# Altium PCB main.PcbDoc
Units mm, origin at the board's own origin, x right, y up, seen from the top; angles counter-clockwise.
Board outline 99 x 99 mm, 4 copper layers (Top Layer, Layer 1, Layer 2, Bottom Layer), stack 1.591 mm thick; 63 components, 42 nets, 302 pads, 0 vias.
Unrouted connection lines stored in the file: 169.
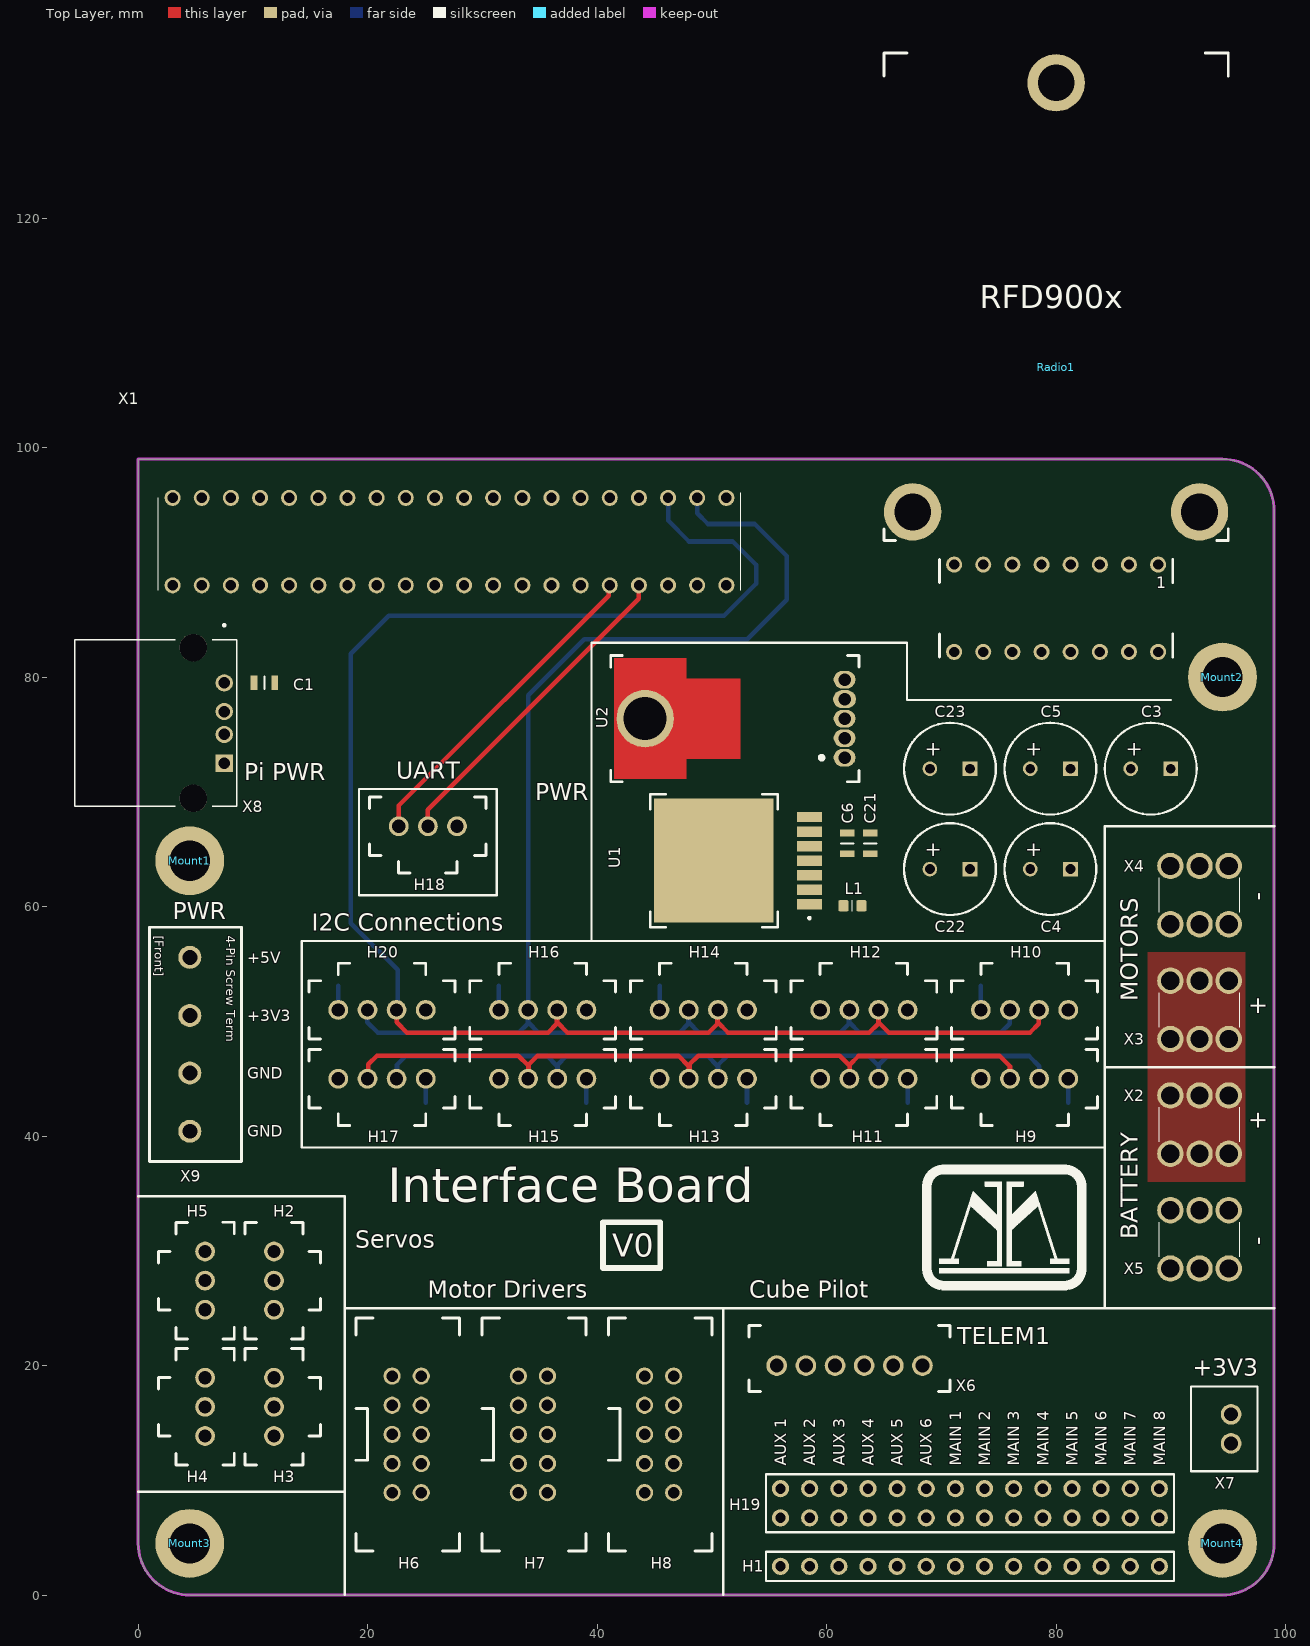
[diagram p0: Top Layer view]
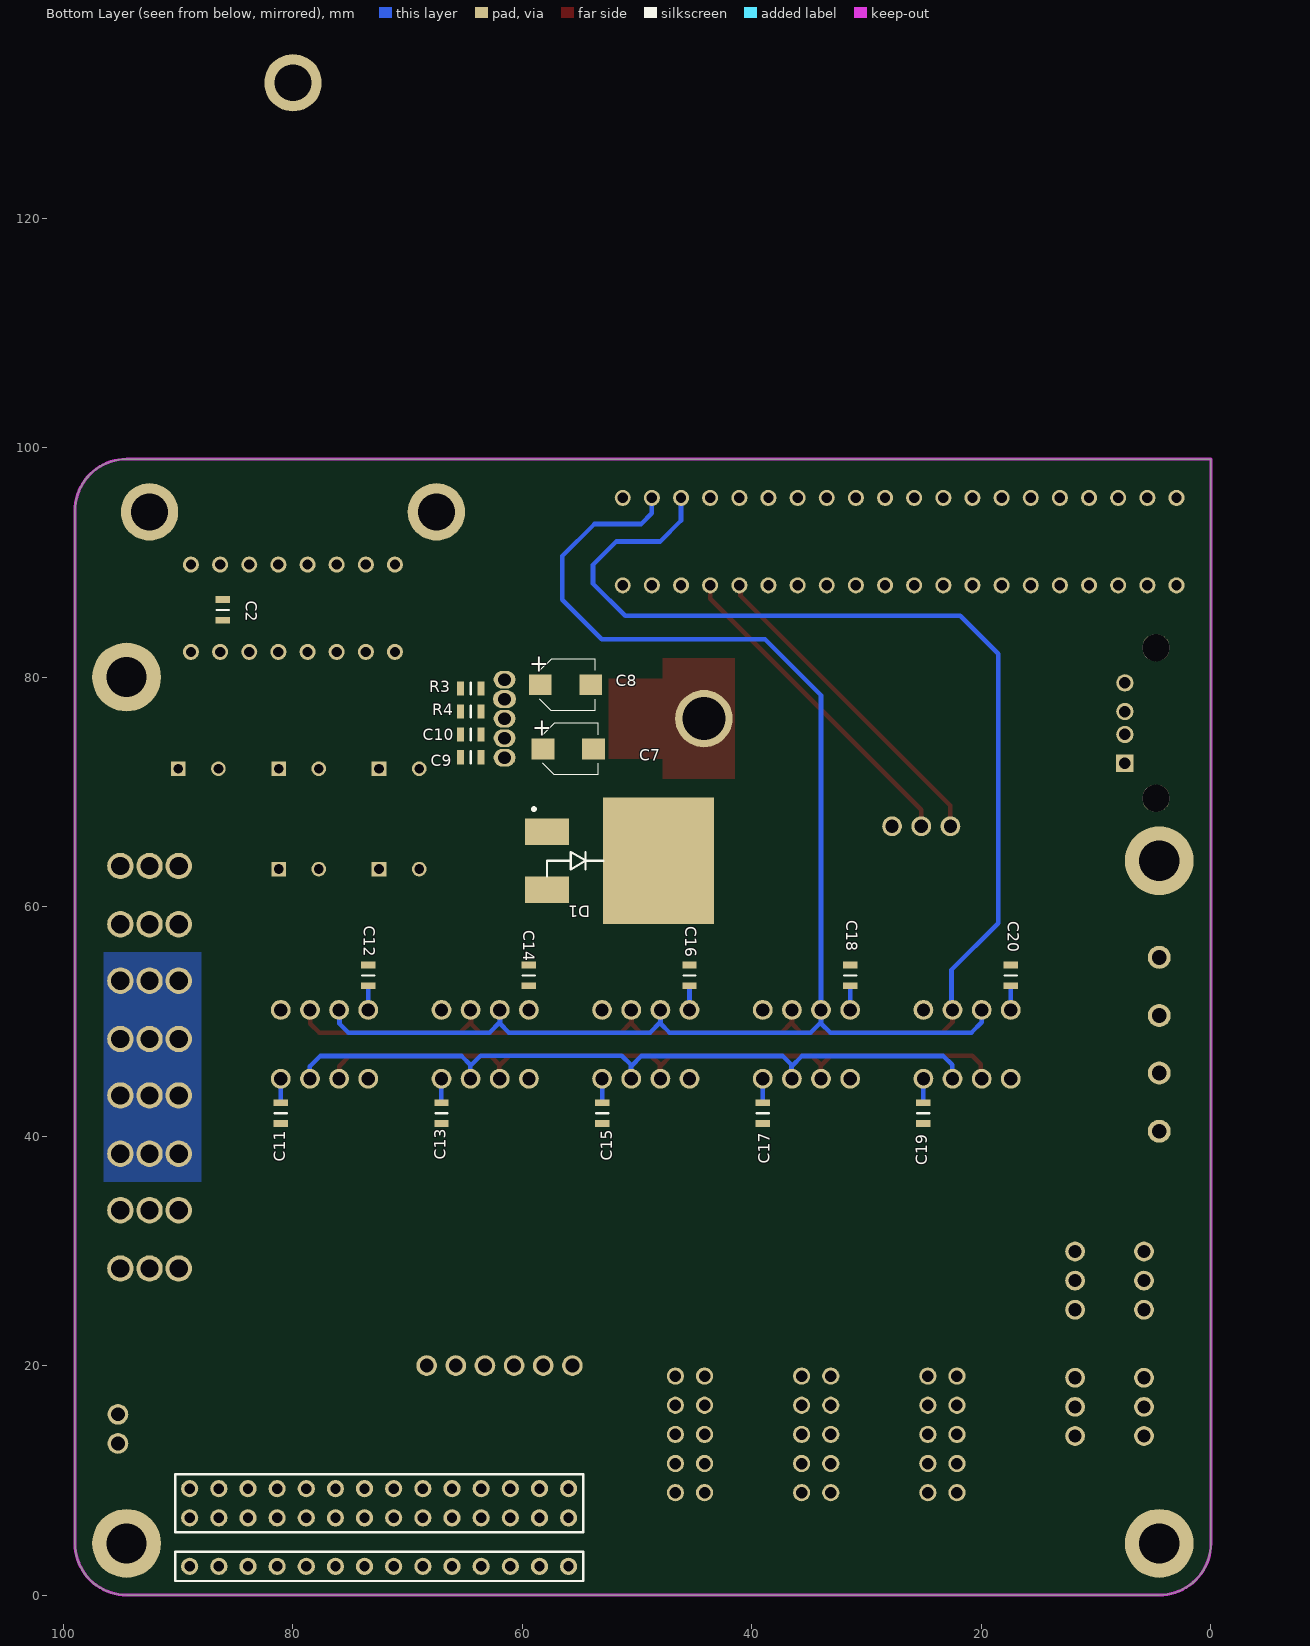
[diagram p1: Bottom Layer view, seen from below]
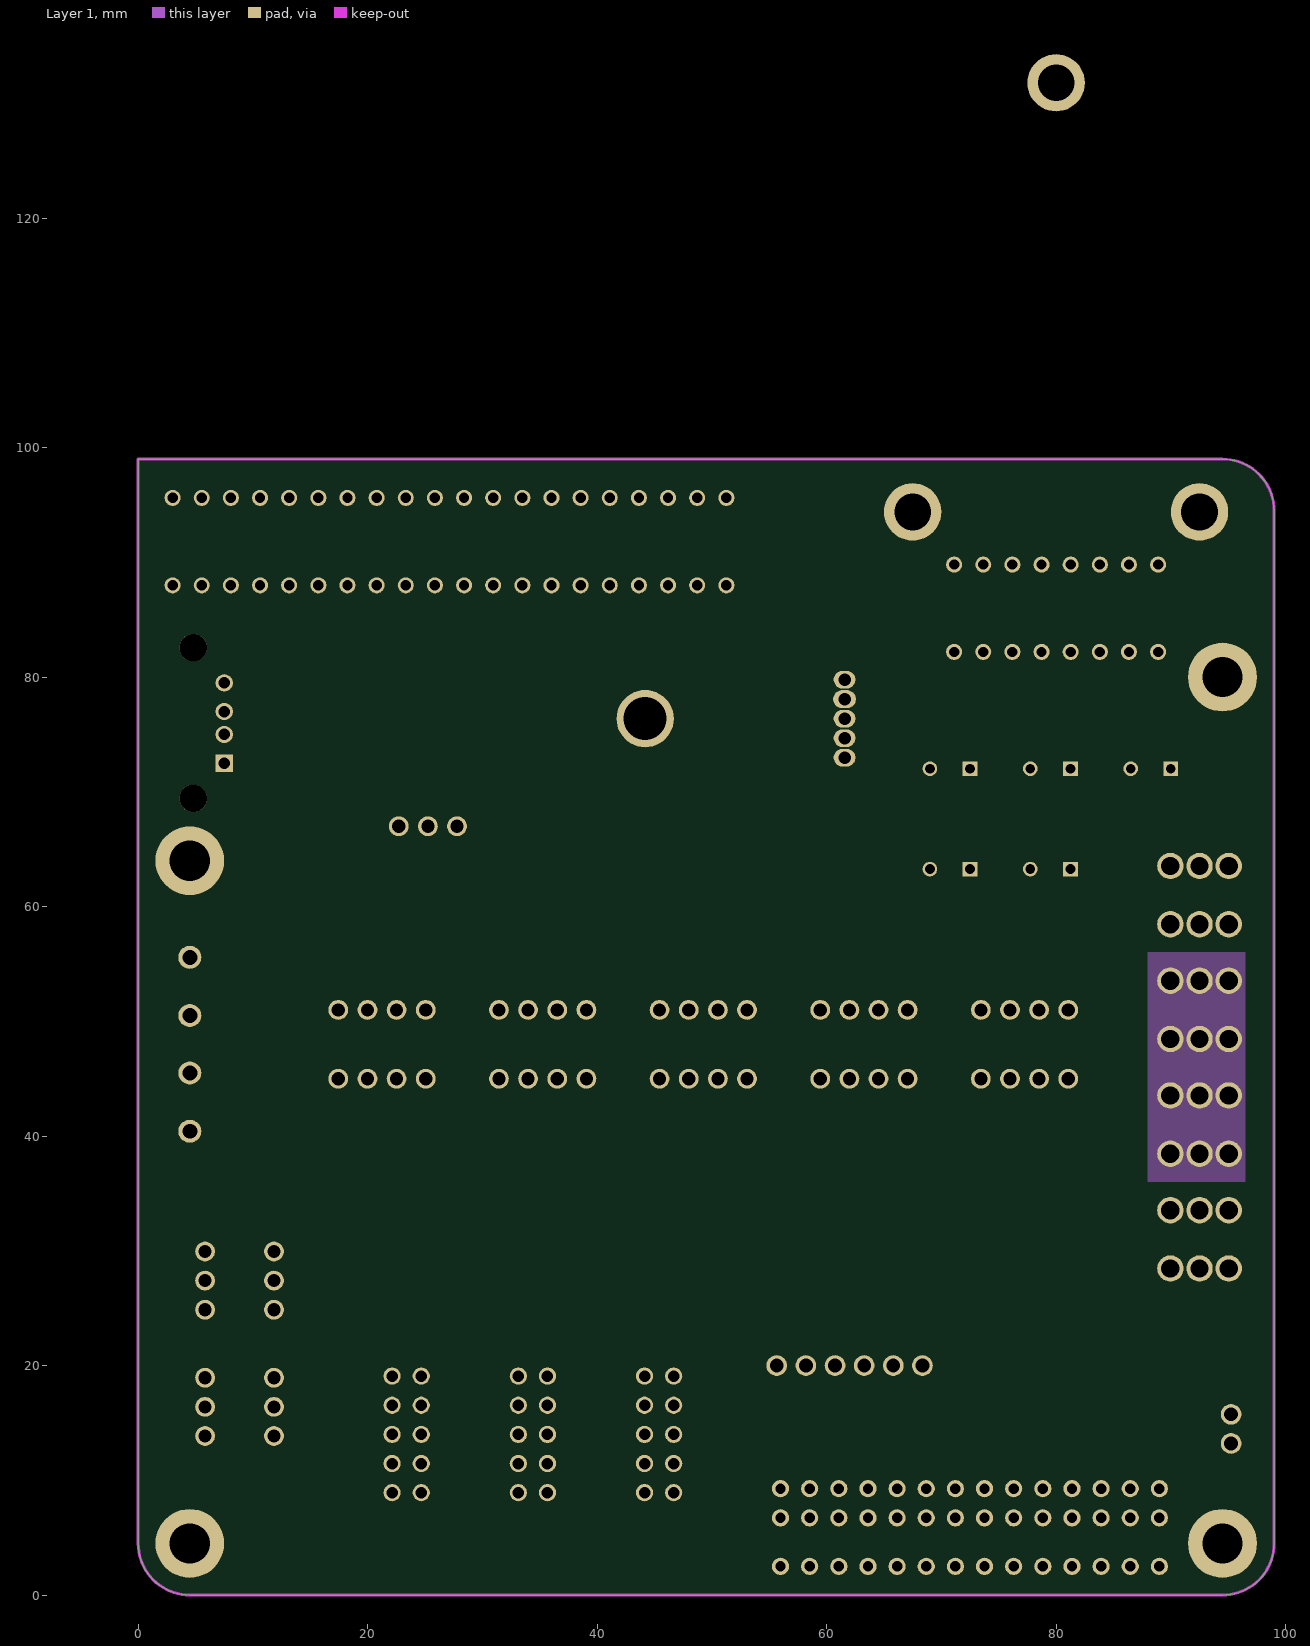
[diagram p2: Layer 1]
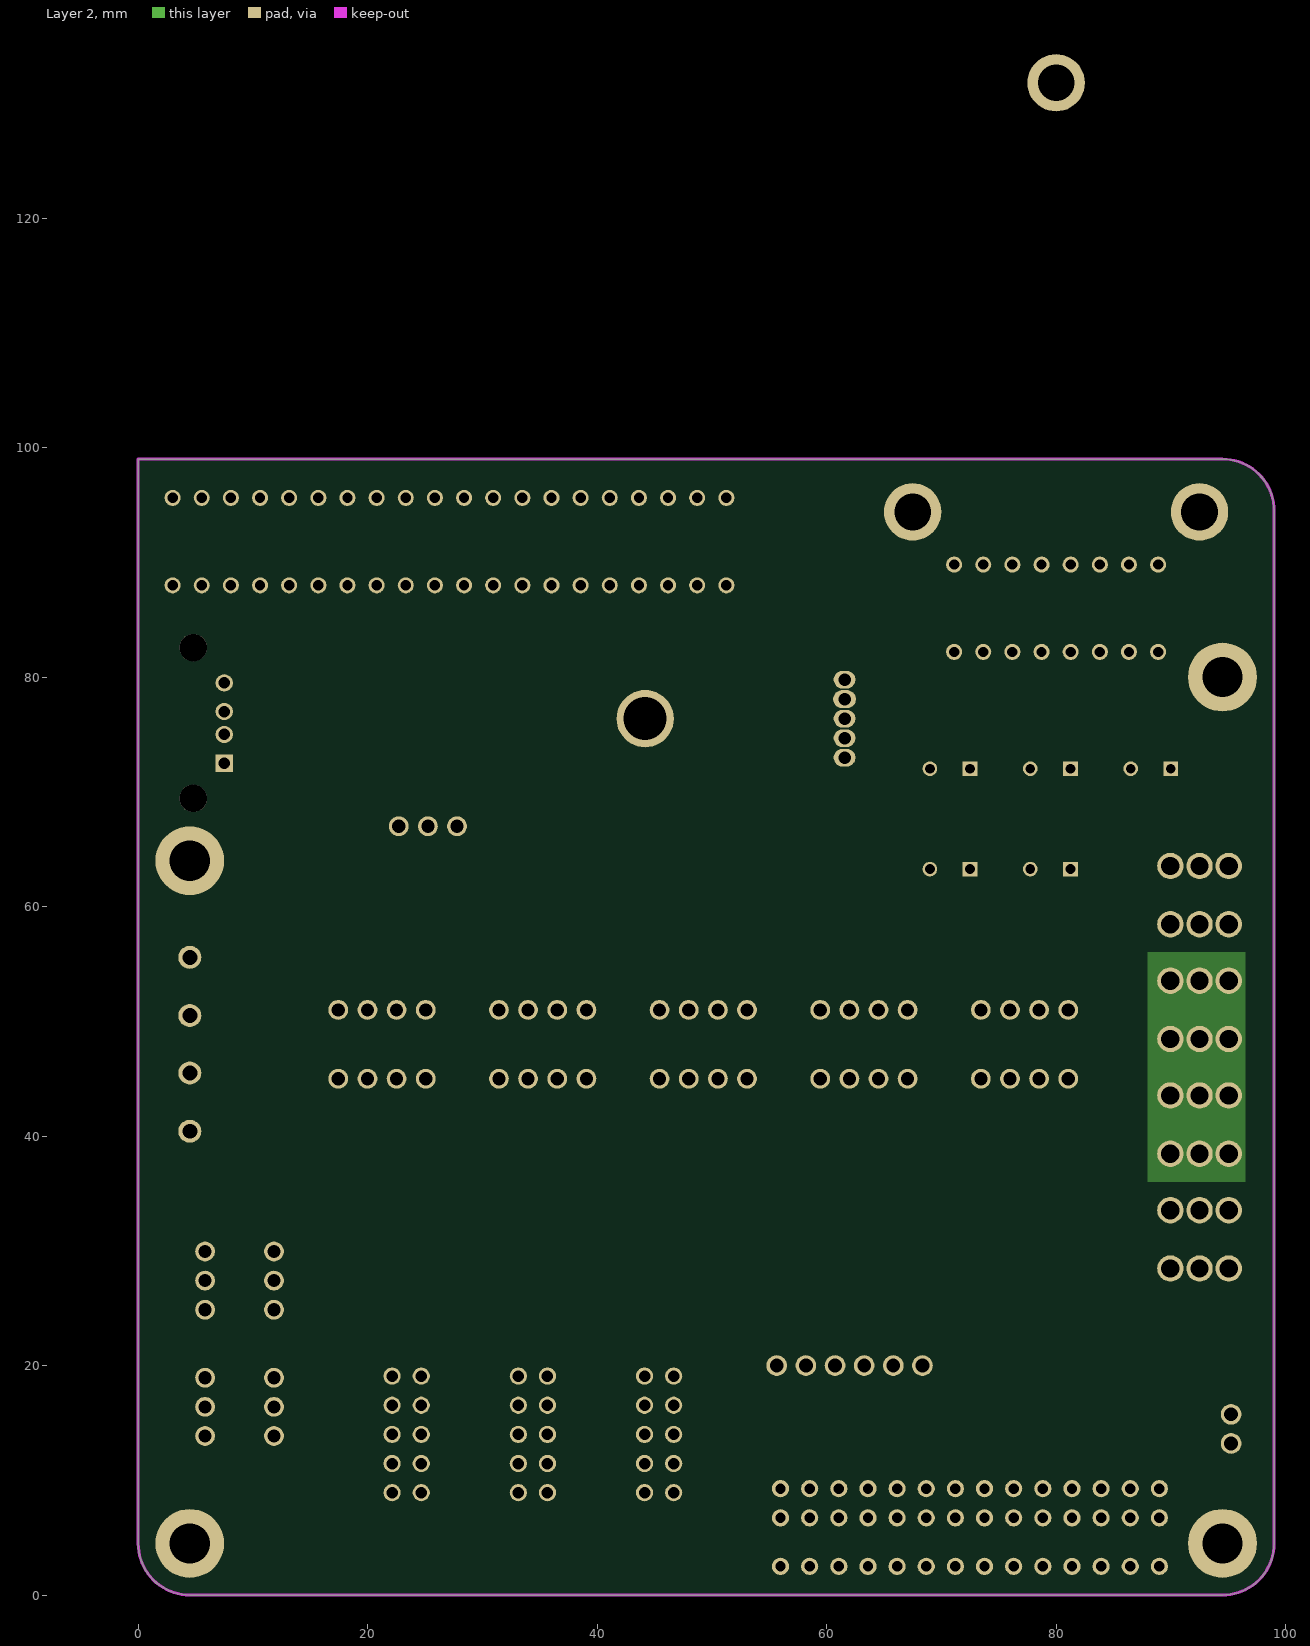
[diagram p3: Layer 2]

## Layer stack, top to bottom
Top Solder: solder mask 0.0102, Solder Resist, Dk 3.8
Top Layer: signal copper 0.035
Dielectric 2: prepreg 0.2104, 7628*1, Dk 4.4
Layer 1: signal copper 0.0175
Dielectric 1: dielectric 1.065, FR-4, Dk 4.8
Layer 2: signal copper 0.0175
Dielectric 3: prepreg 0.2104, 7628*1, Dk 4.4
Bottom Layer: signal copper 0.035
Bottom Solder: solder mask 0.0102, Solder Resist, Dk 3.8

## Board outline
4.5,0 cw(c4.5,4.5) 0,4.5 0,99 94.5,99 cw(c94.5,94.5) 99,94.5 99,4.5 cw(c94.5,4.5) 94.5,0

## Design rules (kind name [scope] priority, off if disabled: settings)
BoardOutlineClearance [All] p1: gap=0.2 ignorepadtopadclearanceinfootprint=FALSE
Clearance "inPolygon Clearance" [InPolygon] p1: gap=0.3 ignorepadtopadclearanceinfootprint=TRUE // this rule ensures that every net within a polygon of a different net has a set clearance from the poly
Clearance "Different Diff Pair" [All] p2: gap=0.2 ignorepadtopadclearanceinfootprint=TRUE
Clearance "Same Diff Pair" [All] p3: gap=0.1 ignorepadtopadclearanceinfootprint=TRUE
Clearance "Different Nets" [not InAnyDifferentialPair] p4: gap=0.3 ignorepadtopadclearanceinfootprint=TRUE except(0.1: Arc-SMDPad Arc-THPad Arc-Via Arc-Text Track-SMDPad Track-THPad Track-Via Track-Text SMDPad-Text THPad-Text Via-Text Fill-Text Poly-Text Region-Text Text-Text; 0.12: Arc-Arc Arc-Track Track-Track; 0.15: SMDPad-SMDPad SMDPad-THPad SMDPad-Via THPad-THPad THPad-Via Via-Via; 0.2: Arc-Hole Track-Hole SMDPad-Hole THPad-Hole Via-Hole Fill-Hole Poly-Hole Region-Hole Text-Hole)
Clearance "Same Net" [not InAnyDifferentialPair] p5: gap=0 ignorepadtopadclearanceinfootprint=TRUE except(0.1: THPad-Via; 0.18: Arc-Arc Arc-Track Track-Track)
ComponentClearance [All] p1: gap=0.102 collisioncheckmode=3 verticalgap=0.102 showdistances=TRUE
DiffPairsRouting "Ethernet Routing" [InDifferentialPairClass('Ethernet_Pairs')] p1: maxlimit=0.25 minlimit=0.2 mostfreqgap=0.25 toplayer_maxgap=0.2 toplayer_prefgap=0.2 toplayer_minwidth=0.25 toplayer_maxwidth=0.25 toplayer_prefwidth=0.25 midlayer1_mingap=0.25 midlayer1_minwidth=0.19 midlayer1_maxwidth=0.19 midlayer1_prefwidth=0.19 midlayer2_mingap=0.25 midlayer2_minwidth=0.19 midlayer2_maxwidth=0.19 midlayer2_prefwidth=0.19 bottomlayer_maxgap=0.2 bottomlayer_prefgap=0.2 bottomlayer_minwidth=0.25 bottomlayer_maxwidth=0.25 bottomlayer_prefwidth=0.25 impedanceprofiledriven=TRUE maxuncoupledlength=12.7
DiffPairsRouting "USB Routing" [InDifferentialPairClass('USB_Pairs')] p2: maxlimit=0.291 minlimit=0.127 mostfreqgap=0.291 toplayer_maxgap=0.127 toplayer_prefgap=0.127 toplayer_minwidth=0.23 toplayer_maxwidth=0.23 toplayer_prefwidth=0.23 midlayer1_mingap=0.291 midlayer1_minwidth=0.25 midlayer1_maxwidth=0.25 midlayer1_prefwidth=0.25 midlayer2_mingap=0.291 midlayer2_minwidth=0.25 midlayer2_maxwidth=0.25 midlayer2_prefwidth=0.25 bottomlayer_maxgap=0.127 bottomlayer_prefgap=0.127 bottomlayer_minwidth=0.23 bottomlayer_maxwidth=0.23 bottomlayer_prefwidth=0.23 impedanceprofiledriven=TRUE maxuncoupledlength=12.7
DiffPairsRouting "CAN Routing" [InDifferentialPairClass('CAN_Pairs')] p3: maxlimit=0.907 minlimit=0.5 mostfreqgap=0.907 toplayer_maxgap=0.5 toplayer_prefgap=0.5 toplayer_minwidth=0.201 toplayer_maxwidth=0.201 toplayer_prefwidth=0.201 midlayer1_mingap=0.907 midlayer1_minwidth=0.155 midlayer1_maxwidth=0.155 midlayer1_prefwidth=0.155 midlayer2_mingap=0.907 midlayer2_minwidth=0.155 midlayer2_maxwidth=0.155 midlayer2_prefwidth=0.155 bottomlayer_maxgap=0.5 bottomlayer_prefgap=0.5 bottomlayer_minwidth=0.201 bottomlayer_maxwidth=0.201 bottomlayer_prefwidth=0.201 impedanceprofiledriven=TRUE maxuncoupledlength=12.7
Height [All] p1: minheight=0 maxheight=1816.048 prefheight=12.7
HoleSize [All] p1: absolutevalues=TRUE maxlimit=6.3 minlimit=0.3 maxpercent=80.000 minpercent=20.000
HoleToHoleClearance [All] p1: gap=0.25 allowstackedmicrovias=FALSE
Length [All] p1: maxlimit=43.432 minlimit=0 usedelayunits=TRUE mindelay=0.000000 maxdelay=10000.000000
MatchedLengths "Diff Pair Matched Delays" [InDifferentialPairClass('Ethernet_Pairs') or InDifferentialPairClass('USB_Pairs') or InDifferentialPairClass('CAN_Pairs')] p1: tolerance=5 checknetsindiffpair=TRUE checkdiffpairvsdiffpair=FALSE checkxsignals=FALSE checkothers=FALSE usedelayunits=TRUE delaytolerance=100.000000
MinimumAnnularRing [All] p1: minimumring=0.2
MinimumSolderMaskSliver [All] p1: minsoldermaskwidth=0
PlaneClearance "Supply Net Clearance" [InNetClass('Supply_Nets')] p1: clearance=0.5
PlaneClearance "All Nets" [All] p2: clearance=0.3
PolygonConnect "Supply Nets" [InNetClass('Supply_Nets')] p1: connectstyle=Direct reliefconductorwidth=0.3 reliefentries=4 polygonreliefangle="90 Angle" airgapwidth=0.254
PolygonConnect General [All] p2: connectstyle=Relief reliefconductorwidth=0.254 reliefentries=4 polygonreliefangle="90 Angle" airgapwidth=0.254
RoutingVias [All] p1: holewidth=0.2 width=0.35 viastyle="Through Hole" minholewidth=0.15 minwidth=0.3 maxholewidth=6.3 maxwidth=6.55
SilkToSilkClearance [All] p1: silktosilkclearance=0
SilkToSolderMaskClearance [All] p1: minsilkscreentomaskgap=0 clearancetoexposedcopper=TRUE
SolderMaskExpansion [All] p1: expansion=0.075 istentingtop=FALSE
SupplyNets "Schematic Supply Nets_4" [InNet('+5V')] p1: voltage=0.000
SupplyNets "Schematic Supply Nets_2" [InNet('Battery VIN')] p2: voltage=0.000
SupplyNets "Schematic Supply Nets_7" [InNet('+3V3')] p3: voltage=0.000
SupplyNets "Schematic Supply Nets_3" [InNet('GND')] p4: voltage=0.000
SupplyNets "Schematic Supply Nets_1" [InNet('Earth')] p5: voltage=0.000
UnRoutedNet [All] p1: checkbadconnections=TRUE
Width [All] p1: maxlimit=100 minlimit=0.1 preferedwidth=0.3
Width "nRF Width" [InNetClass('nRF Signal')] p2: maxlimit=0.379 minlimit=0.263 preferedwidth=0.379 toplayer_minwidth=0.379 midlayer1_maxwidth=0.263 midlayer1_prefwidth=0.263 midlayer2_maxwidth=0.263 midlayer2_prefwidth=0.263 bottomlayer_minwidth=0.379 impedanceprofiledriven=TRUE minimp=50.000000 maximp=50.000000 favimp=50.000000 checkconnectedcopper=TRUE
20 further rules are at their usual default settings.

## Classes and differential pairs
net class Supply_Nets: +3V3 +5V "Battery VIN" GND
component class "Raspberry Pi and RF Devices": C1 C2 Radio1 X1
component class Misc: H18 Mount1 Mount2 Mount3 Mount4
component class "I2C Connections": C11 C12 C13 C14 C15 C16 C17 C18 C19 C20 H9 H10 H11 H12 H13 H14 H15 H16 H17 H20
net class "Motor VOUT": "Battery VIN"
component class Power: C3 C4 C5 C6 C7 C8 C9 C10 C21 C22 C23 D1 L1 R3 R4 U1 U2 X2 X3 X4 X5 X8 X9
component class "CubePilot and Motor Drivers": H1 H2 H3 H4 H5 H6 H7 H8 H19 X6 X7

## Components (designator, comment, footprint, x,y, rotation, side; value= is the part's Value field where it differs from the comment)
C1 "SMD Nonpolarized" "[Cap] SMD 0805" 11,79.5 r0 top
C2 "SMD Nonpolarized" "[Cap] SMD 0805" 86.106,85.852 r270 bottom
C3 "Thru-Hole Polarized" "[Cap] Thru-Hole Polarized 3.5mm" 88.25,72 r0 top
C4 "Thru-Hole Polarized" "[Cap] Thru-Hole Polarized 3.5mm" 79.5,63.25 r0 top
C5 "Thru-Hole Polarized" "[Cap] Thru-Hole Polarized 3.5mm" 79.5,72 r0 top
C6 "SMD Nonpolarized" "[Cap] SMD 0805" 61.8,65.5 r90 top
C7 "SMD Polarized" "[Cap] SMD Polarized, 4mm" 55.994,73.739 r180 bottom
C8 "SMD Polarized" "[Cap] SMD Polarized, 4mm" 56.248,79.327 r180 bottom
C9 "SMD Nonpolarized" "[Cap] SMD 0805" 64.5,73 r180 bottom
C10 "SMD Nonpolarized" "[Cap] SMD 0805" 64.5,75 r180 bottom
C11 "SMD Nonpolarized" "[Cap] SMD 0805" 81.06,42 r90 bottom
C12 "SMD Nonpolarized" "[Cap] SMD 0805" 73.44,54 r270 bottom
C13 "SMD Nonpolarized" "[Cap] SMD 0805" 67.06,42 r90 bottom
C14 "SMD Nonpolarized" "[Cap] SMD 0805" 59.44,54 r270 bottom
C15 "SMD Nonpolarized" "[Cap] SMD 0805" 53.06,42 r90 bottom
C16 "SMD Nonpolarized" "[Cap] SMD 0805" 45.44,54 r270 bottom
C17 "SMD Nonpolarized" "[Cap] SMD 0805" 39.06,42 r90 bottom
C18 "SMD Nonpolarized" "[Cap] SMD 0805" 31.44,54 r270 bottom
C19 "SMD Nonpolarized" "[Cap] SMD 0805" 25.06,42 r90 bottom
C20 "SMD Nonpolarized" "[Cap] SMD 0805" 17.44,54 r270 bottom
C21 "SMD Nonpolarized" "[Cap] SMD 0805" 63.8,65.5 r90 top
C22 "Thru-Hole Polarized" "[Cap] Thru-Hole Polarized 3.5mm" 70.75,63.25 r0 top
C23 "Thru-Hole Polarized" "[Cap] Thru-Hole Polarized 3.5mm" 70.75,72 r0 top
D1 "Schottky" "[Diode] SMD TO263AB" 53,64 r270 bottom
H1 "1x14 Female Right Angle" "[Header] 1x14 Right Angle Female" 89,2.5 r180 top
H2 "1x3 Male" "[Header] Shrouded 1x3 Male" 11.834,27.401 r270 top
H3 "1x3 Male" "[Header] Shrouded 1x3 Male" 11.834,16.401 r270 top
H4 "1x3 Male" "[Header] Shrouded 1x3 Male" 5.834,16.401 r90 top
H5 "1x3 Male" "[Header] Shrouded 1x3 Male" 5.834,27.401 r90 top
H6 "2x5 Shrouded" "[Header] Shrouded 2x5 Male" 23.5,14 r270 top
H7 "2x5 Shrouded" "[Header] Shrouded 2x5 Male" 34.5,14 r270 top
H8 "2x5 Shrouded" "[Header] Shrouded 2x5 Male" 45.5,14 r270 top
H9 "1x4 Male" "[Header] Shrouded 1x4 Male" 77.25,45 r180 top
H10 "1x4 Male" "[Header] Shrouded 1x4 Male" 77.25,51 r0 top
H11 "1x4 Male" "[Header] Shrouded 1x4 Male" 63.25,45 r180 top
H12 "1x4 Male" "[Header] Shrouded 1x4 Male" 63.25,51 r0 top
H13 "1x4 Male" "[Header] Shrouded 1x4 Male" 49.25,45 r180 top
H14 "1x4 Male" "[Header] Shrouded 1x4 Male" 49.25,51 r0 top
H15 "1x4 Male" "[Header] Shrouded 1x4 Male" 35.25,45 r180 top
H16 "1x4 Male" "[Header] Shrouded 1x4 Male" 35.25,51 r0 top
H17 "1x4 Male" "[Header] Shrouded 1x4 Male" 21.25,45 r180 top
H18 "1x3 Male" "[Header] Shrouded 1x3 Male" 25.247,67 r180 top
H19 "2x14 Header" "[Header] 2x14 Male" 72.49,8 r180 top
H20 "1x4 Male" "[Header] Shrouded 1x4 Male" 21.25,51 r0 top
L1 "SMD Inductor" "[Inductor] SMD 0603" 62.25,60.072 r0 top
Mount1 "M3 Mount Hole" "[Mount] M3 Mount Hole"#1 11.734,42.864 r0 top
Mount2 "M3 Mount Hole" "[Mount] M3 Mount Hole"#2 91.345,83.136 r90 top
Mount3 "M3 Mount Hole" "[Mount] M3 Mount Hole"#3 4.5,4.5 r90 top
Mount4 "M3 Mount Hole" "[Mount] M3 Mount Hole"#3 94.5,4.5 r90 top
R3 "[Res] SMD Resistor" "[Res] SMD 0805" 64.5,79 r0 bottom
R4 "[Res] SMD Resistor" "[Res] SMD 0805" 64.5,77 r180 bottom
Radio1 "RFDX900" "[Device] RFDX900 Radio" 80,86 r0 top
U1 "5V 5A" "[Reg] 5V Regulator (3)" 52.25,64 r0 top
U2 "3V3" "[Reg] Variable Voltage Regulator" 52,76.377 r90 top
X1 "Raspberry Pi 5" "[Device] Raspberry Pi 5" 3,88 r0 top
X2 "7461057" "[Port] Shank Connector (100A)" 92.5,41 r90 top
X3 "7461057" "[Port] Shank Connector (100A)" 92.5,51 r90 top
X4 "7461057" "[Port] Shank Connector (100A)" 92.5,61 r90 top
X5 "7461057" "[Port] Shank Connector (100A)" 92.5,31 r90 top
X6 "JST" "[JST] 6pin 2.54mm" 62,20 r0 top
X7 "JST" "[JST] 2PIN 2.54mm" 95.25,14.478 r90 top
X8 "Type A" "[Port] USB Type-A Female" 7.5,76 r270 top
X9 "4pin Screw Terminal" "[Screw Terminal] 4pin 5mm" 4.5,48 r270 top

## Footprints (in the part's own frame and the unit in brackets; to place one, negate y for a bottom-side part, rotate by r counter-clockwise, add the part's x,y. Pads: shape width x height; smd on the part's side, far side on the other; paste and mask are expansions set on the pad)
"[Cap] SMD 0805" [mm]
  rect 0.6x1.25 smd: 1(-0.9,0) 2(0.9,0)
  silkscreen extent 0,-0.53 0,0.53, body extent -1,-0.63 1,0.63, height 1
"[Cap] SMD Polarized, 4mm" [mm]
  rect 2x1.8 smd: 1(-2.2,0) 2(2.2,0)
  silkscreen extent -2.25,-2.25 2.6,2.25, body extent -2.6,-2.25 2.6,2.25, height 5.66
"[Cap] Thru-Hole Polarized 3.5mm" [mm] "3.5mm"
  round 1.275 hole 0.85: 1(-1.75,0.018)
  rect 1.275x1.275 hole 0.85: 2(1.75,0.018)
  silkscreen extent -4,-3.98 4,4.02, body extent -4.24,-4.25 4.24,4.25, height 13
"[Device] Raspberry Pi 5" [mm]
  round 1.4 hole 0.9: 1(48.26,7.62) 2(48.26,0) 3(45.72,7.62) 4(45.72,0) 5(43.18,7.62) 7(40.64,7.62) 8(40.64,0) 10(38.1,0) 11(35.56,7.62) 12(35.56,0) 13(33.02,7.62) 15(30.48,7.62) 16(30.48,0) 17(27.94,7.62) 18(27.94,0) 19(25.4,7.62) 20(25.4,0) 21(22.86,7.62) 22(22.86,0) 23(20.32,7.62) 24(20.32,0) 26(17.78,0) 27(15.24,7.62) 28(15.24,0) 29(12.7,7.62) 31(10.16,7.62) 32(10.16,0) 33(7.62,7.62) 35(5.08,7.62) 36(5.08,0) 37(2.54,7.62) 38(2.54,0) 40(0,0) GND(0,7.62) GND(7.62,0) GND(12.7,0) GND(17.78,7.62) GND(33.02,0) GND(38.1,7.62) GND(43.18,0)
  silkscreen extent -1.27,-0.44 49.53,8.06, body extent -32.39,-7.99 56.65,12.65, height 56.94
"[Device] RFDX900 Radio" [mm] "RFDX900 Long-Range RF Module"
  round 1.4 hole 0.9: 1(8.89,-3.81) 2(8.89,3.81) 3(6.35,-3.81) 4(6.35,3.81) 5(3.81,-3.81) 6(3.81,3.81) 7(1.27,-3.81) 8(1.27,3.81) 9(-1.27,-3.81) 10(-1.27,3.81) 11(-3.81,-3.81) 12(-3.81,3.81) 13(-6.35,-3.81) 14(-6.35,3.81) 15(-8.89,-3.81) 16(-8.89,3.81)
  round 5 hole 3.2: X(-12.5,8.395) X(0,45.795) X(12.5,8.395)
  silkscreen extent -15,-4.25 15,48.4, body extent -15,-4.25 15,100.2, height 12.75
"[Diode] SMD TO263AB" [mm]
  rect 2.32x3.81 smd: 1(-2.525,-4.86) 3(2.525,-4.86)
  rect 11x9.65 smd: 2(0,4.86)
  silkscreen extent -4.6,-6.1 1.36,0.03, body extent -5.33,-7.05 5.33,10.48, height 4.83
"[Header] 1x14 Right Angle Female" [mm]
  round 1.5 hole 0.9: 1(0,0) 2(2.54,0) 3(5.08,0) 4(7.62,0) 5(10.16,0) 6(12.7,0) 7(15.24,0) 8(17.78,0) 9(20.32,0) 10(22.86,0) 11(25.4,0) 12(27.94,0) 13(30.48,0) 14(33.02,0)
  silkscreen extent -1.27,-1.27 34.29,1.27, body extent -1.29,-0.2 34.27,10.15, height 3
"[Header] 2x14 Male" [mm] "2.54mm pitch"
  round 1.5 hole 0.9: 1(-16.51,-1.27) 2(-16.51,1.27) 3(-13.97,-1.27) 4(-13.97,1.27) 5(-11.43,-1.27) 6(-11.43,1.27) 7(-8.89,-1.27) 8(-8.89,1.27) 9(-6.35,-1.27) 10(-6.35,1.27) 11(-3.81,-1.27) 12(-3.81,1.27) 13(-1.27,-1.27) 14(-1.27,1.27) 15(1.27,-1.27) 16(1.27,1.27) 17(3.81,-1.27) 18(3.81,1.27) 19(6.35,-1.27) 20(6.35,1.27) 21(8.89,-1.27) 22(8.89,1.27) 23(11.43,-1.27) 24(11.43,1.27) 25(13.97,-1.27) 26(13.97,1.27) 27(16.51,-1.27) 28(16.51,1.27)
  silkscreen extent -17.78,-2.54 17.78,2.54, body extent -17.78,-2.54 17.78,2.54, height 9.5
"[Header] Shrouded 1x3 Male" [mm] "070543-0037 / Mates with 005057-9403"
  round 1.725 hole 1.15: 1(-2.54,0) 2(0,0) 3(2.54,0)
  silkscreen extent -5.08,-2.54 5.09,4.06, body extent -5.08,-2.54 5.08,4.06, height 11.67
"[Header] Shrouded 1x4 Male" [mm] "70543-0003 / Mates with 0050579404"
  round 1.725 hole 1.15: 1(-3.81,0) 2(-1.27,0) 3(1.27,0) 4(3.81,0)
  silkscreen extent -6.35,-2.54 6.36,4.06, body extent -6.35,-2.54 6.35,4.06, height 11.64
"[Header] Shrouded 2x5 Male" [mm]
  round 1.5 hole 1: 1(-5.08,-1.37) 2(-5.08,1.17) 3(-2.54,-1.37) 4(-2.54,1.17) 5(0,-1.37) 6(0,1.17) 7(2.54,-1.37) 8(2.54,1.17) 9(5.08,-1.37) 10(5.08,1.17)
  silkscreen extent -10.15,-4.52 10.15,4.52, body extent -10.15,-4.52 10.15,4.52, height 8.8
"[Inductor] SMD 0603" [mm]
  rrect30% 0.9x0.97 smd: 1(-0.785,0) 2(0.785,0)
  silkscreen extent 0,-0.48 0,0.48, body extent -0.8,-0.4 0.8,0.4, height 0.95
"[JST] 2PIN 2.54mm" [mm]
  round 1.8 hole 1.2: 1(-1.27,0) 2(1.27,0)
  silkscreen extent -3.7,-2.3 3.7,3.5, body extent -3.67,-2.28 3.67,3.47, height 7.88
"[JST] 6pin 2.54mm" [mm] "2.54mm pitch"
  round 1.8 hole 1.2: 1(-6.35,0) 2(-3.81,0) 3(-1.27,0) 4(1.27,0) 5(3.81,0) 6(6.35,0)
  silkscreen extent -8.75,-2.28 8.75,3.47, body extent -8.75,-2.28 8.75,3.47, height 6.88
"[Mount] M3 Mount Hole"#1 [mm] "Place at least 4.5mm from board edge. Plated."
  round 6 hole 3.5: 1(-7.234,21.136)
"[Mount] M3 Mount Hole"#2 [mm] "Place at least 4.5mm from board edge. Plated."
  round 6 hole 3.5: 1(-3.136,-3.155)
"[Mount] M3 Mount Hole"#3 [mm] "Place at least 4.5mm from board edge. Plated."
  round 6 hole 3.5: 1(0,0)
"[Port] Shank Connector (100A)" [mm]
  round 2.3 hole 1.6: 1(-2.54,-2.54) 1(-2.54,0) 1(-2.54,2.54) 1(2.54,-2.54) 1(2.54,0) 1(2.54,2.54)
  silkscreen extent -1.5,-3.5 1.5,3.5, body extent -3.5,-3.5 3.5,3.5, height 6
"[Port] USB Type-A Female" [mm]
  round 1.508 hole 1: 1(-3.5,0) 2(-1,0) 3(1,0)
  rect 1.508x1.508 hole 1: 4(3.5,0)
  round 2.38 hole 2.38 unplated: S1(-6.57,-2.71) S2(6.57,-2.71)
  silkscreen extent -8.61,-13.01 7.25,1.09, body extent -7.9,-13.01 7.9,1.09, height 7.6
"[Reg] 5V Regulator (3)" [mm] "LM2678SX-5.0/NOPB"
  rect 2.16x0.91 smd: 1(6.25,-3.81) 2(6.25,-2.54) 3(6.25,-1.27) 4(6.25,0) 5(6.25,1.27) 6(6.25,2.54) 7(6.25,3.81)
  rect 10.41x10.8 smd: 8(-2.07,0)
  silkscreen extent -7.62,-5.8 6.35,5.8, body extent -7.12,-5.08 7.18,5.08, height 4.72
"[Reg] Variable Voltage Regulator" [mm] "MIC29302WT"
  oval 1.55x1.9 hole 1.1: 1(-3.4,-9.563) 2(-1.7,-9.563) 3(0,-9.563) 5(3.4,-9.563)
  oval 1.58x2 hole 1.1: 4(1.7,-9.563)
  round 5 hole 3.75: X(0,7.813)
  round 0.025 smd: X(0,5.011)
  Top Layer region: -5.25,4.236 -3.5,4.236 -3.5,-0.489 3.5,-0.489 3.5,4.236 5.25,4.236 5.25,10.511 -5.25,10.511
  silkscreen extent -5.5,-10.81 5.5,10.81, body extent -5.08,-9.77 5.08,10.4, height 5.06
"[Res] SMD 0805" [mm]
  rect 0.6x1.25 smd: 1(-0.9,0) 2(0.9,0)
  silkscreen extent 0,-0.53 0,0.53, body extent -1,-0.63 1,0.63, height 0.5
"[Screw Terminal] 4pin 5mm" [mm]
  round 2 hole 1.3: 1(-7.58,0) 2(-2.5,0) 3(2.5,0) 4(7.58,0)
  silkscreen extent -10.2,-3.5 10.2,4.5, body extent -10.53,-3.5 10.09,4.1, height 9.99

## Part data
C1 C2 C11 C12 C13 C14 C15 C16 C17 C18 C19 C20: library part "[Cap] SMD Nonpolarized", Capacitance=100nF, Size Package=0805
C3 C4 C5: library part "[Cap] Thru-Hole Polarized", "EEU-FC1H150H", Capacitance=15uF, Tolerance=20%, Voltage=50V, Pin Spacing=3mm
C6: library part "[Cap] SMD Nonpolarized", Capacitance=100nF, Size Package=0805, Tolerance=20%, Voltage=6.3V
C7 C8: library part "[Cap] SMD Polarized", Capacitance=47uF, Diameter=4mm
C9 C10: library part "[Cap] SMD Nonpolarized", Capacitance=0.1uF, Size Package=0805
C21: library part "[Cap] SMD Nonpolarized", Capacitance=0.47uF, Size Package=0805, Tolerance=20%, Voltage=50V
C22 C23: library part "[Cap] Thru-Hole Polarized", "EEU-FC1H150H", Capacitance=180uF, Tolerance=20%, Voltage=50V, Pin Spacing=3mm
D1: library part "[Diode] SMD Schottky", "Generic", Size Package=TO263AB
H1: library part "[Header] 1x14 Right Angle Female", "2.54mm pitch"
H2 H3 H4 H5 H18: library part "[Header] Shrouded 1x3 Male", "070543-0037 / Mates with 005057-9403", Supplier Part Number 1=WM4825-ND, Supplier 1=DigiKey
H6 H7 H8: library part "[Header] Shrouded 2x5 Male", "BHR-10-VUA"
H9 H10 H11 H12 H13 H14 H15 H16 H17 H20: library part "[Header] Shrouded 1x4 Male", "70543-0003 / Mates with 0050579404"
H19: library part "[Header] 2x14 Male", "2.54mm pitch"
L1: library part "[Inductor] SMD Inductor", Inductance=10uH, Size Package=0603
Mount1 Mount2 Mount3 Mount4: library part "[Mount] M3 Mount Hole", "Place at least 4.5mm from board edge. Plated."
R3: Resistance=10k, Size Package=0805
R4: Resistance=6000, Size Package=0805
Radio1: library part "[Device] RFDX900 Radio", "RFDX900 Long-Range RF Module"
U1: library part "[Reg] 5V Regulator (3)", "LM2678SX-5.0/NOPB"
U2: library part "[Reg] Variable Voltage Regulator", "MIC29302WT"
X1: library part "[Device] Raspberry Pi 5"
X2 X3 X4 X5: library part "[Port] Shank Connector (100A)", "7461057, internal thread"
X6: library part "[JST] 6pin 2.54mm", "2.54mm pitch"
X7: library part "[JST] 2pin 2.54mm", "2.54mm pitch"
X8: library part "[Port] USB Type-A Female (Thru-Hole)"
X9: library part "[Screw Terminal] 4pin"

## Nets (pads, with @x,y where several pads share a name; then routed paths per layer and width w, separated by ;. In a path a pad name is that pad's centre, name@x,y a point inside that pad or via, vN(x,y) a via of type N, cw(c..) or ccw(c..) an arc to the next point about the centre after c; other vN are vias at no path point)
+3V3: C8.1 C10.2 R3.2 U2.4 X7.1 X9.2
+5V: C1.1 C2.1 C11.2 C12.2 C13.2 C14.2 C15.2 C16.2 C17.2 C18.2 C19.2 C20.2 C22.1 C23.1 H2.2 H3.2 H4.2 H5.2 H6.1 H6.2 H7.1 H7.2 H8.1 H8.2 H9.1 H10.1 H11.1 H12.1 H13.1 H14.1 H15.1 H16.1 H17.1 H20.1 L1.2 Radio1.4 X8.1 X9.1 | length 18.9
  Bottom Layer w0.4: H20.1 C20.2 ; C19.2 H17.1 ; H16.1 C18.2 ; C17.2 H15.1 ; H14.1 C16.2 ; C15.2 H13.1 ; C13.2 H11.1 ; H10.1 C12.2 ; C11.2 H9.1
"AUX Out 1": H1.14 H19.28
"AUX Out 1_X": H2.3 H19.27
"AUX Out 2": H1.13 H19.26
"AUX Out 2_X": H3.3 H19.25
"AUX Out 3": H1.12 H19.24
"AUX Out 3_X": H4.3 H19.23
"AUX Out 4": H1.11 H19.22
"AUX Out 4_X": H5.3 H19.21
"AUX Out 5": H1.10 H19.20
"AUX Out 6": H1.9 H19.18
"Battery RX": H18.2 X1.8 | length 28.6
  Top Layer w0.4: H18.2 25.247,68.427 43.64,86.82 X1.8
"Battery TX": H18.3 X1.10 | length 28.6
  Top Layer w0.4: H18.3 22.707,68.808 40.999,87.1 40.999,87.899 X1.10
"Battery VIN": C3.1 C4.1 C5.1 C7.1 C9.2 C21.2 U1.2 U1.7 U2.1 U2.2 X2.1 X3.1
"Control 1": H6.5 H6.6 H7.5 H7.6 H8.5 H8.6
"Control 2": H6.7 H6.8 H7.7 H7.8 H8.7 H8.8
Earth: Mount1.1 Mount2.1 Mount3.1 Mount4.1 X8.S1 X8.S2
GND: C1.2 C2.2 C3.2 C4.2 C5.2 C7.2 C8.2 C9.1 C10.1 C11.1 C12.1 C13.1 C14.1 C15.1 C16.1 C17.1 C18.1 C19.1 C20.1 C21.1 C22.2 C23.2 D1.2 H2.1 H3.1 H4.1 H5.1 H6.9 H6.10 H7.9 H7.10 H8.9 H8.10 H9.4 H10.4 H11.4 H12.4 H13.4 H14.4 H15.4 H16.4 H17.4 H18.1 H20.4 R4.1 Radio1.1 Radio1.2 Radio1.16 U1.4 U1.8 U2.3 X1.GND X4.1 X5.1 X6.6 X7.2 X8.4 X9.3 X9.4
"Main Out 1": H1.8 H19.16
"Main Out 1_X": H6.3 H19.15
"Main Out 2": H1.7 H19.14
"Main Out 2_X": H6.4 H19.13
"Main Out 3": H1.6 H19.12
"Main Out 3_X": H7.3 H19.11
"Main Out 4": H1.5 H19.10
"Main Out 4_X": H7.4 H19.9
"Main Out 5": H1.4 H19.8
"Main Out 5_X": H8.3 H19.7
"Main Out 6": H1.3 H19.6
"Main Out 6_X": H8.4 H19.5
"Main Out 7": H1.2 H19.4
"Main Out 8": H1.1 H19.2
NetC6_1: C6.1 U1.3
NetC6_2: C6.2 D1.1 L1.1 U1.1 U1.6
NetR3_1: R3.1 R4.2 U2.5
"Radio CTS": Radio1.3 X6.4
"Radio RTS": Radio1.11 X6.5
"Radio RX": Radio1.7 X6.2
"Radio TX": Radio1.9 X6.3
SCL: H9.3 H10.3 H11.3 H12.3 H13.3 H14.3 H15.3 H16.3 H17.3 H20.3 X1.5 | length 219.3
  Top Layer w0.4: H17.3@20.014,45.034 20.048,45.068 20.048,46.25 20.81,47.012 33.129,47.012 34.014,46.127 H15.3@34.014,45.034 ; H20.3 22.52,49.907 23.405,49.022 35.724,49.022 36.486,49.784 36.486,50.966 H16.3 36.52,49.907 37.405,49.022 49.724,49.022 50.486,49.784 50.486,50.966 H14.3 50.52,49.907 51.405,49.022 63.724,49.022 64.486,49.784 64.486,50.966 H12.3 64.52,49.907 65.405,49.022 77.724,49.022 78.486,49.784 78.486,50.966 H10.3 ; H15.3 H15.3@34.014,45.034 ; H13.3 47.98,46.093 47.095,46.978 34.776,46.978 34.014,46.216 H15.3@34.014,45.034 ; H13.3@48.014,45.034 48.048,45.068 48.048,46.25 48.81,47.012 61.129,47.012 62.014,46.127 H11.3@62.014,45.034 ; H11.3 H11.3@62.014,45.034 ; H9.3 75.98,46.093 75.095,46.978 62.776,46.978 62.014,46.216 H11.3@62.014,45.034
  Bottom Layer w0.4: H20.3 22.606,51.086 22.606,54.483 18.542,58.547 18.542,82.042 21.844,85.344 51.054,85.344 53.848,88.138 53.848,89.789 51.816,91.821 48.006,91.821 46.18,93.647 X1.5
SDA: H9.2 H10.2 H11.2 H12.2 H13.2 H14.2 H15.2 H16.2 H17.2 H20.2 X1.3 | length 203.7
  Bottom Layer w0.4: H20.2 19.98,49.907 20.865,49.022 33.184,49.022 33.946,49.784 33.946,50.966 H16.2 ; H17.2 22.554,45.034 22.554,46.216 23.316,46.978 35.635,46.978 36.52,46.093 H15.2 36.554,45.034 36.554,46.216 37.316,46.978 49.635,46.978 50.52,46.093 H13.2 ; X1.3 48.72,94.282 49.657,93.345 53.721,93.345 56.515,90.551 56.515,86.741 53.086,83.312 38.862,83.312 33.98,78.43 H16.2 ; H13.2@50.537,45.017 50.571,45.051 50.571,46.233 51.333,46.995 63.652,46.995 64.537,46.11 H11.2@64.537,45.017 ; H11.2 64.554,45.034 64.554,46.216 65.316,46.978 77.635,46.978 78.52,46.093 H9.2 ; H10.2 75.946,50.966 75.946,49.784 75.184,49.022 62.865,49.022 61.98,49.907 H12.2 61.946,50.966 61.946,49.784 61.184,49.022 48.865,49.022 47.98,49.907 H14.2 47.946,50.966 47.946,49.784 47.184,49.022 34.865,49.022 33.98,49.907 H16.2
pads on no net: D1.3 H19.1 H19.3 H19.17 H19.19 Radio1.5 Radio1.6 Radio1.8 Radio1.10 Radio1.12 Radio1.13 Radio1.14 Radio1.15 Radio1.X U1.5 U2.X X1.1 X1.2 X1.4 X1.7 X1.11 X1.12 X1.13 X1.15 X1.16 X1.17 X1.18 X1.19 X1.20 X1.21 X1.22 X1.23 X1.24 X1.26 X1.27 X1.28 X1.29 X1.31 X1.32 X1.33 X1.35 X1.36 X1.37 X1.38 X1.40 X6.1 X8.2 X8.3

## Polygon pours and split planes (outlines as drawn)
"Battery VIN" on Top Layer "Batt VIN" (solid, remove dead copper, pour order 5): 96.5,56 96.5,36 88,36 88,56
"Battery VIN" on Top Solder "Batt VIN" (solid, remove dead copper, pour order 2): 96.5,56 96.5,36 88,36 88,56
"Battery VIN" on Bottom Layer "Batt VIN" (solid, remove dead copper, pour order 3): 96.5,56 96.5,36 88,36 88,56
"Battery VIN" on Bottom Solder "Batt VIN" (solid, remove dead copper, pour order 4): 96.5,56 96.5,36 88,36 88,56
"Battery VIN" on Layer 1 "Batt VIN" (solid, remove dead copper, pour order 0): 96.5,56 96.5,36 88,36 88,56
"Battery VIN" on Layer 2 "Batt VIN" (solid, remove dead copper, pour order 6): 96.5,56 96.5,36 88,36 88,56

## Keep-outs
Keep-Out Layer:
  the board outline again, w0.254

## Silkscreen, mask and mechanical layers (free items; w line width, h text height)
Top Overlay:
  drawing of 30 lines, arcs and shapes, not listed
  text "UART" at 22.495,71.15 h1.5
  text "Pi PWR" at 9.24,71 h1.5
  text "PWR" at 34.601,69.25 h1.5
  text "-" at 98.25,60.5 h1.5 r90
  text "PWR" at 3.001,58.9 h1.5
  text "I2C Connections" at 15.128,57.9 h1.5
  text "+5V" at 9.5,55.08 h1
  text "MOTORS" at 87.1,51.751 h1.5 r90
  text "+" at 98.25,50.5 h1.5 r90
  text "+3V3" at 9.5,50 h1
  text "GND" at 9.5,45 h1
  text "+" at 98.25,40.5 h1.5 r90
  text "GND" at 9.5,39.92 h1
  text "Interface Board" at 21.757,34.25 h3
  text "BATTERY" at 87.1,31.002 h1.5 r90
  text "-" at 98.25,30.5 h1.5 r90
  text "Servos" at 18.9,30.25 h1.5
  text "V0" at 41.334,29.5 h2
  text "Motor Drivers" at 25.253,25.9 h1.5
  text "Cube Pilot" at 53.252,25.9 h1.5
  text "TELEM1" at 71.4,21.85 h1.5
  text "+3V3" at 91.901,19.1 h1.5
  text "AUX 1" at 56.48,11.25 h1 r90
  text "AUX 2" at 59.02,11.25 h1 r90
  text "AUX 3" at 61.56,11.25 h1 r90
  text "AUX 4" at 64.1,11.25 h1 r90
  text "AUX 5" at 66.64,11.25 h1 r90
  text "AUX 6" at 69.18,11.25 h1 r90
  text "MAIN 1" at 71.72,11.25 h1 r90
  text "MAIN 2" at 74.26,11.25 h1 r90
  text "MAIN 3" at 76.8,11.25 h1 r90
  text "MAIN 4" at 79.34,11.25 h1 r90
  text "MAIN 5" at 81.88,11.25 h1 r90
  text "MAIN 6" at 84.42,11.25 h1 r90
  text "MAIN 7" at 86.96,11.25 h1 r90
  text "MAIN 8" at 89.5,11.25 h1 r90

## Text inside footprints (layer, text, board x,y; h text height)
C3: Top Overlay "+" at 86.067,73.128 h1.3
C4: Top Overlay "+" at 77.317,64.378 h1.3
C5: Top Overlay "+" at 77.317,73.128 h1.3
C7: Bottom Overlay "+" at 59.161,74.894 h1.5
C8: Bottom Overlay "+" at 59.415,80.482 h1.5
C22: Top Overlay "+" at 68.567,64.378 h1.3
C23: Top Overlay "+" at 68.567,73.128 h1.3
Radio1: Top Overlay "RFD900x" at 73.335,112.145 h2; Top Overlay "1" at 88.723,87.75 h1
X9: Top Overlay "[Front]" at 1.458,57.462 h0.75 r270; Top Overlay "4-Pin Screw Term" at 7.681,57.462 h0.75 r270